# Altium PCB design6.PcbDoc
Units mil, origin at the board's own origin, x right, y up, seen from the top; angles counter-clockwise.
Board outline 866.14 x 3937.01 mil, 2 copper layers (Top Layer, Bottom Layer); 53 components, 36 nets, 172 pads, 186 vias.
Unrouted connection lines stored in the file: 50.
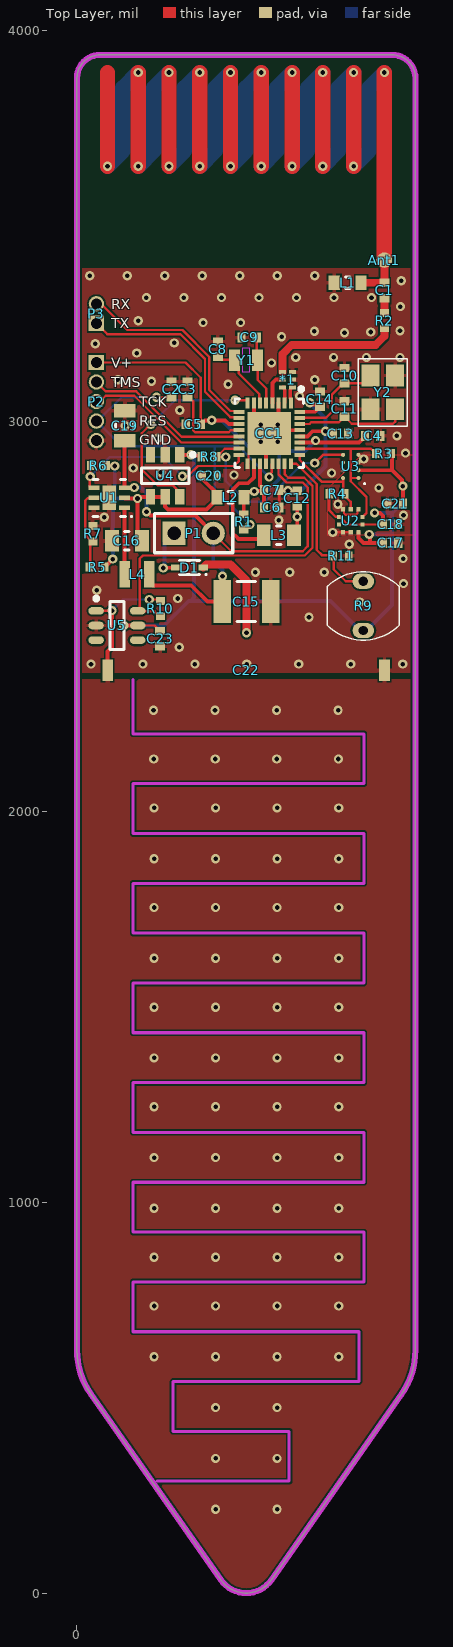
[diagram p0: Top Layer view]
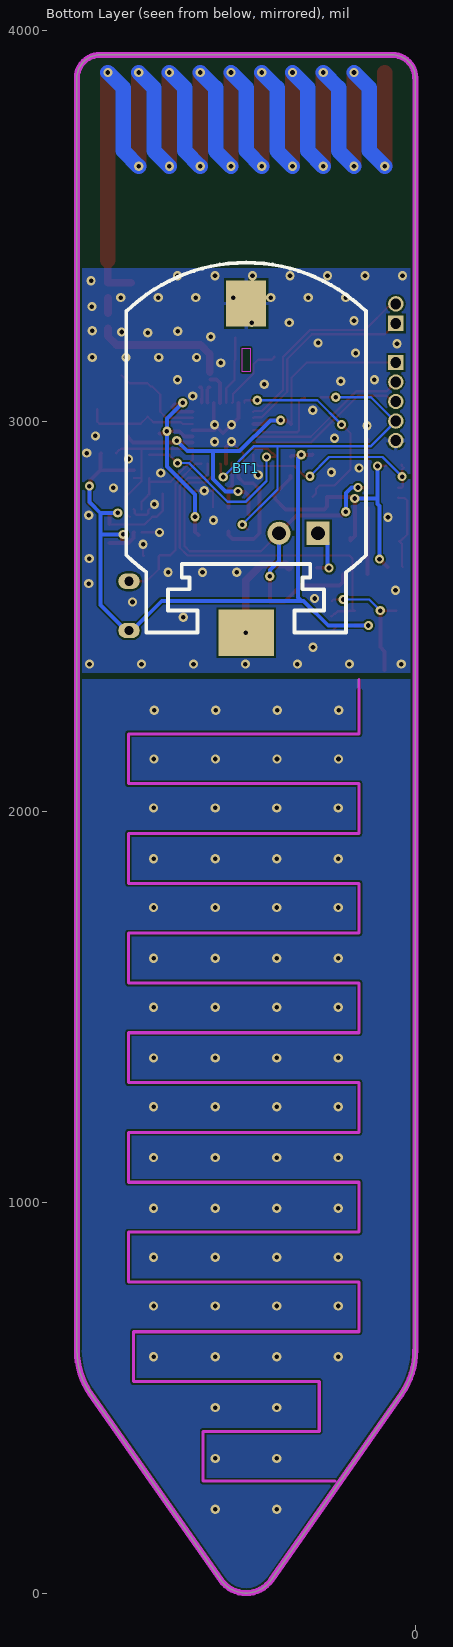
[diagram p1: Bottom Layer view, seen from below]
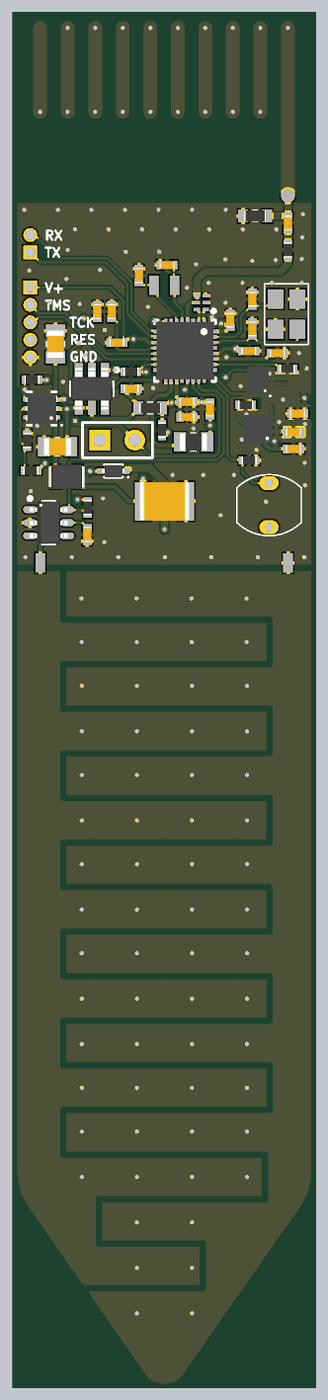
[diagram p2: 3D render of the assembled board from above, using the file's embedded part models]

## Layer stack, top to bottom
Top Solder: solder mask 0.4, Solder Resist, Dk 3.5
Top Layer: signal copper 1.4
Dielectric 1: dielectric 12.6, FR-4, Dk 4.8
Bottom Layer: signal copper 1.4
Bottom Solder: solder mask 0.4, Solder Resist, Dk 3.5

## Board outline
35.85,509.36 cw(c197.1,622.27) 0.25,622.27 0.25,3878.2 cw(c59.31,3878.2) 59.31,3937.26 807.34,3937.26 cw(c807.34,3878.2) 866.39,3878.2 866.39,622.27 cw(c669.54,622.27) 830.79,509.36 497.82,33.83 cw(c433.32,78.99) 368.82,33.83

## Design rules (kind name [scope] priority, off if disabled: settings)
Clearance [All] p1: gap=5 ignorepadtopadclearanceinfootprint=FALSE
DiffPairsRouting [All] p1: maxlimit=5 minlimit=5 mostfreqgap=5 toplayer_minwidth=8.58 toplayer_maxwidth=8.58 toplayer_prefwidth=8.58 bottomlayer_minwidth=8.58 bottomlayer_maxwidth=8.58 bottomlayer_prefwidth=8.58 maxuncoupledlength=500
Height Height_1 [InComponent('U2')] p1: minheight=0 maxheight=3937.01 prefheight=500
Height [All] p2: minheight=0 maxheight=1000 prefheight=500
HoleSize [All] p1: absolutevalues=TRUE maxlimit=100 minlimit=11.81 maxpercent=80.000 minpercent=20.000
MinimumSolderMaskSliver [All] p1: minsoldermaskwidth=5
PlaneClearance [All] p1: clearance=5
PlaneConnect [All] p1: planeconnectstyle=Direct reliefexpansion=20 reliefentries=4 reliefconductorwidth=10 reliefairgap=10
PolygonConnect [All] p1: thpad.connectstyle=Relief thpad.reliefconductorwidth=10 thpad.reliefentries=4 thpad.polygonreliefangle="90 Angle" thpad.airgapwidth=5 smdpad.connectstyle=Relief smdpad.reliefconductorwidth=10 smdpad.reliefentries=4 smdpad.polygonreliefangle="90 Angle" smdpad.airgapwidth=5 via.connectstyle=Direct via.reliefconductorwidth=10 via.reliefentries=4 via.polygonreliefangle="90 Angle" via.airgapwidth=10
RoutingVias [All] p1: holewidth=15.75 width=27.56 viastyle="Through Hole" minholewidth=11.81 minwidth=23.62 maxholewidth=19.68 maxwidth=31.5
SilkToSilkClearance [All] p1: silktosilkclearance=6
SolderMaskExpansion [All] p1: expansion=5
Width Width_50ohm [InNet('Net*1_1') OR InNet('NetAnt1_1')] p1: maxlimit=50 minlimit=20 preferedwidth=20 minimp=50.000000 maximp=50.000000 favimp=50.000000
Width [All] p2: maxlimit=10 minlimit=5 preferedwidth=6 minimp=50.000000 maximp=50.000000 favimp=50.000000
23 further rules are at their usual default settings.

## Classes and differential pairs
differential pair RF: +RF_P -RF_N

## Components (designator, comment, footprint, x,y, rotation, side; value= is the part's Value field where it differs from the comment)
*1 "0850BM14E0016" 0850BM14E0016 552,3086.32 r90 top
Ant1 "Antenna 868 Helix" ANTENNA_868_HELIX 787,3412 r180 top locked
BT1 "Battery Coin Cell" S8421-45R 433,2519.68 r180 bottom
C1 "Cap" "0402 (CAP)" 787,3334.31 r90 top value=8.2pF
C2 "Cap" "0402 (CAP)" 242,3081 r90 top value=100nF
C3 "Cap" "0402 (CAP)" 283,3081 r270 top value=1uF
C4 "Cap" "0402 (CAP)" 757,2962 r180 top value=100nF
C5 "Cap" "0402 (CAP)" 298,2992 r0 top value=100nF
C6 "Cap" "0402 (CAP)" 498.5,2779.19 r180 top value=22uF
C7 "Cap" "0402 (CAP)" 498.5,2823.19 r180 top value=100nF
C8 "Cap" "0402 (CAP)" 361,3184 r270 top value=12pF
C9 "Cap" "0402 (CAP)" 441,3214 r0 top value=12pF
C10 "DNM" "0402 (CAP)" 685,3116 r270 top value=12pF
C11 "DNM" "0402 (CAP)" 685,3031 r270 top value=12pF
C12 "Cap" "0402 (CAP)" 564,2802 r270 top value=22uF
C13 "Cap" "0402 (CAP)" 675,2968 r180 top value=100nF
C14 "Cap" "0402 (CAP)" 622,3056 r270 top value=100nF
C15 "GRM32EC70J107ME15L" "1210 (CAP)" 434,2538 r180 top value=100uF
C16 "Cap" "0805 (CAP)" 128,2694 r0 top value=22uF
C17 "Cap" "0402 (CAP)" 803,2688 r180 top value=100nF
C18 "Cap" "0402 (CAP)" 803,2736 r180 top value=100nF
C19 "Cap" "0805 (CAP)" 122,2988 r270 top value=10uF
C20 "Cap" "0402 (CAP)" 339,2860 r180 top value=1uF
C21 "Cap" "0402 (CAP)" 814.79,2789 r0 top value=100nF
C22 "Chumidity" SOIL_CAP 433.07,669.29 r0 top locked value=1pF
C23 "Cap" "0402 (CAP)" 213,2443 r90 top value=100nF
CC1 "CC1310F32RSMR" CC1310F32RSMR 492.38,2968.76 r270 top
D1 "RB751S40T5G" SOD-523 288,2625 r180 top
L1 "Inductor" "0603 (IND)" 693,3354 r180 top value=68nH
L2 "BLM18HE152SN1D" "0603 (IND)" 393,2805 r0 top value="1500 Ohm"
L3 "MLZ2012N6R8LT000" "0805 (IND)" 517,2708 r0 top value=6.8uH
L4 "Inductor" SRN2009T 154,2608 r180 top value=3.3uH
P1 "Header 2" HDR1X2 249,2713 r0 top
P2 "Header 5" 5pin-1.27 50,3050 r270 top
P3 "Header 2" 2pin-1.27 50,3275 r90 top
R1 "Res1" "0402 (RES)" 427,2742 r90 top value=100K
R2 "" "0402 (RES)" 787,3257 r90 top value=0
R3 "Res1" "0402 (RES)" 785,2917 r0 top value=4.7K
R4 "Res1" "0402 (RES)" 666,2814 r180 top value=4.7K
R5 "DNM" "0402 (RES)" 52,2626.49 r180 top value=0
R6 "Res1" "0402 (RES)" 55,2886 r180 top value=10K
R7 "DNM" "0402 (RES)" 41,2711.69 r90 top value=0
R8 "Res1" "0402 (RES)" 338.21,2909 r0 top value=4.7K
R9 "200K - 10K" Photoresistor 733,2527 r90 top
R10 "Rcharge" "0402 (RES)" 213.79,2520 r270 top value=1k
R11 "Res1" "0402 (RES)" 676,2655 r180 top value=4.7K
U1 "TPS61291" TPS61291 82.68,2803.37 r180 top
U2 "BMP388, Pressure sensor" BMP388 701,2745 r270 top
U3 "HDC1010, Humidity, Temp" HDC1010 701,2884 r180 top
U4 "TPS22860" SOT23-5 226,2860 r270 top
U5 "74LVC2G14, Inverting Schmitt Trigger" 74LVC2G14 102.46,2476.85 r0 top
Y1 "32.768 kHz" "FC-12M 32.7680KA-A3" 433,3156 r0 top
Y2 "TSX-3225 24.0000MF20G-AC3" "TSX-3225 24.0000MF20G-AC3" 782.91,3073.32 r270 top

## Footprints (in the part's own frame and the unit in brackets; to place one, negate y for a bottom-side part, rotate by r counter-clockwise, add the part's x,y. Pads: shape width x height; smd on the part's side, far side on the other; paste and mask are expansions set on the pad)
2pin-1.27 [mm]
  rect 1x1 hole 0.7: 1(-0.635,0)
  round 1 hole 0.7: 2(0.635,0)
5pin-1.27 [mm]
  rect 1x1 hole 0.7: 1(-2.54,0)
  round 1 hole 0.7: 2(-1.27,0) 3(0,0) 4(1.27,0) 5(2.54,0)
74LVC2G14 [mm] "TSOP, 6-Leads, Body 2,90x1,50mm, Pitch 0,95mm, IPC Medium Density"
  oval 1x0.5 smd: 1(-1.35,0.95) 2(-1.35,0) 3(-1.35,-0.95) 4(1.35,-0.95) 5(1.35,0) 6(1.35,0.95)
  silkscreen extent -1.47,-1.55 0.45,1.87, body extent -1.38,-1.55 1.38,1.55, height 1.1
"0402 (CAP)" [mm] "Chip Capacitor, 2-Leads, Body 1,60x0,80mm, IPC Medium Density"
  rect 0.54x0.64 smd: 1(-0.5,0) 2(0.5,0)
  body extent -0.55,-0.3 0.55,0.3, height 0.4
"0402 (RES)" [mm] "Chip Resistor, 2-Leads, Body 1,00x0,50mm, IPC Medium Density"
  rect 0.5x0.6 smd: 1(-0.5,0) 2(0.5,0)
  body extent -0.55,-0.3 0.55,0.3, height 0.4
"0603 (IND)" [mm]
  rect 0.72x0.94 smd: 1(-0.87,0) 2(0.87,0)
  silkscreen extent -0.15,-0.37 0.15,0.37, body extent -0.8,-0.4 0.8,0.4, height 0.6
"0805 (CAP)" [mm] "Chip Capacitor, 2-Leads, Body 2,00x1,25mm, IPC Medium Density"
  rect 0.9x1.4 smd: 1(-0.975,0) 2(0.975,0)
  silkscreen extent -0.15,-0.6 0.15,0.6, body extent -1,-0.63 1,0.63, height 0.6
"0805 (IND)" [mm] "Chip Inductor, 2-Leads, Body 2,00x1,25mm, IPC Medium Density"
  rect 0.9x1.39 smd: 1(-0.98,0) 2(0.98,0)
  silkscreen extent -0.15,-0.6 0.15,0.6, body extent -1,-0.63 1,0.63, height 0.6
0850BM14E0016 [mm]
  rect 0.25x0.45 smd: 1(1,0.65) 2(0.5,0.65) 3(0,0.65) 4(0,0) 5(0.5,0) 6(1,0)
"1210 (CAP)" [mm] "Chip Capacitor, 2-Leads, Body 3,20x2,50mm, IPC Medium Density"
  rect 1.15x2.8 smd: 1(-1.575,0) 2(1.575,0)
  silkscreen extent -0.6,-1.3 0.6,1.3, body extent -1.8,-1.4 1.8,1.4, height 2.8
ANTENNA_868_HELIX [mm]
  round 1 smd: 1(0,0)
  Top Layer lines w1: 18,-6.1 18,-12.2 ; 16,-6.1 16,-12.2 ; 14,-6.1 14,-12.2 ; 12,-6.1 12,-12.2 ; 10,-6.1 10,-12.2 ; 8,-6.1 8,-12.2 ; 6,-6.1 6,-12.2 ; 4,-6.1 4,-12.2 ; 2,-6.1 2,-12.2 ; 0,0 0,-12.2
  Bottom Layer lines w1: 18,-6.1 17,-7.1 17,-11.2 16,-12.2 ; 16,-6.1 15,-7.1 15,-11.2 14,-12.2 ; 14,-6.1 13,-7.1 13,-11.2 12,-12.2 ; 12,-6.1 11,-7.1 11,-11.2 10,-12.2 ; 10,-6.1 9,-7.1 9,-11.2 8,-12.2 ; 8,-6.1 7,-7.1 7,-11.2 6,-12.2 ; 6,-6.1 5,-7.1 5,-11.2 4,-12.2 ; 4,-6.1 3,-7.1 3,-11.2 2,-12.2 ; 2,-6.1 1,-7.1 1,-11.2 0,-12.2
BMP388 [mm] "LGA, 10-Leads, Body 2,00x2,00mmx0,80mm, Pitch 0,50mm"
  rect 0.275x0.275 smd: 1(0.25,0.762) 2(-0.25,0.762) 3(-0.75,0.5) 4(-0.75,0) 5(-0.75,-0.5) 6(-0.25,-0.763) 7(0.25,-0.763) 8(0.75,-0.5) 9(0.75,0) 10(0.75,0.5)
  body extent -1.02,-1.03 1.65,1.02, height 30
CC1310F32RSMR [mm] "QFN, 32-Leads, Body 4,00x4,00mm, Pitch 0,40mm, Thermal Pad 2,80x2,80mm, IPC Medium Density"
  rect 0.7x0.26 smd: 1(-1.975,1.4) 2(-1.975,1) 3(-1.975,0.6) 4(-1.975,0.2) 5(-1.975,-0.2) 6(-1.975,-0.6) 7(-1.975,-1) 8(-1.975,-1.4) 17(1.975,-1.4) 18(1.975,-1) 19(1.975,-0.6) 20(1.975,-0.2) 21(1.975,0.2) 22(1.975,0.6) 23(1.975,1) 24(1.975,1.4)
  rect 0.26x0.7 smd: 9(-1.4,-1.975) 10(-1,-1.975) 11(-0.6,-1.975) 12(-0.2,-1.975) 13(0.2,-1.975) 14(0.6,-1.975) 15(1,-1.975) 16(1.4,-1.975) 25(1.4,1.975) 26(1,1.975) 27(0.6,1.975) 28(0.2,1.975) 29(-0.2,1.975) 30(-0.6,1.975) 31(-1,1.975) 32(-1.4,1.975)
  rect 2.8x2.8 smd: 33(0,0)
  silkscreen extent -3,-2.22 2.22,2.22, body extent -2.08,-2.08 2.08,2.08, height 1
"FC-12M 32.7680KA-A3" [mm]
  rect 0.7x1.4 smd: 1(-0.75,0) 2(0.75,0)
  Keep-Out Layer region: -0.254,-0.762 0.254,-0.762 0.254,0.762 -0.254,0.762
HDC1010 [mm] "BGA, 8-Leads, Body 1,59x2,04mmx0,68mm, Pitch 0,50mm"
  round 0.26 smd: A1(-0.5,0.75) A2(0.5,0.75) B1(-0.5,0.25) B2(0.5,0.25) C1(-0.5,-0.25) C2(0.5,-0.25) D1(-0.5,-0.75) D2(0.5,-0.75)
  silkscreen extent -0.95,1.08 -0.85,1.17, body extent -0.79,-1.02 0.79,1.02, height 0.67
HDR1X2 [mm] "Connector; Header; 2 Position"
  rect 1.5x1.5 hole 0.9: 1(0,0)
  round 1.5 hole 0.9: 2(2.54,0)
  silkscreen extent -1.27,-1.27 3.81,1.27
Photoresistor [mm]
  oval 1x1.4 hole 0.6: 1(-1.6,0) 2(1.6,0)
  silkscreen extent -2.22,-2.35 2.22,2.35
S8421-45R [mm]
  rect 3.6x3 smd: 1(0,-1.556)
  rect 2.6x3 smd: 2(0,19.844)
  silkscreen extent -7.8,-1.56 7.8,22.5
SOD-523 [mm] "Molded Diode, 2-Leads, Body 1,20x0,80mm, IPC Medium Density"
  rect 0.6x0.4 smd: 1(-0.9,0) 2(0.9,0)
  silkscreen extent -1.12,-0.45 0.65,0.5, body extent -0.87,-0.45 0.87,0.45, height 0.7
SOIL_CAP [mm]
  rect 0.7x1.4 smd: 1(-9,43) 2(9,43)
  Keep-Out Layer lines w0.2: -7.339,42.393 -7.339,38.867 7.661,38.867 7.661,35.628 -7.339,35.628 -7.339,32.389 7.661,32.389 7.661,29.15 -7.339,29.15 -7.339,25.911 7.661,25.911 7.661,22.672 -7.339,22.672 -7.339,19.434 7.661,19.434 7.661,16.195 -7.339,16.195 -7.339,12.956 7.661,12.956 7.661,9.717 -7.339,9.717 -7.339,6.478 7.661,6.478 7.661,3.239 -7.339,3.239 -7.339,0 7.339,0 7.339,-3.239 -4.749,-3.239 -4.749,-6.478 2.803,-6.478 2.803,-9.717 -5.777,-9.717
SOT23-5 [mm] "SOT23, 5-Leads, Body 2,90x2,80mm, Pitch 0,95mm, IPC Medium Density"
  rect 1x0.6 smd: 1(-1.375,0.95) 2(-1.375,0) 3(-1.375,-0.95) 4(1.375,-0.95) 5(1.375,0) 6(1.375,0.95)
  silkscreen extent -1.5,-1.55 0.5,1.93, body extent -1.5,-1.53 1.5,1.53, height 1.45
SRN2009T [mm] "Molded Inductor, 2-Leads, Body 2,00x1,60mm, IPC Medium Density"
  rect 0.7x1.7 smd: 1(-0.8,0) 2(0.8,0)
  body extent -1.32,-0.9 1.32,0.9, height 0.95
TPS61291 [mm] "SON, 6-Leads, Body 2,00x2,00mm, Pitch 0,65mm, Thermal Pad 1,60x0,89mm, IPC Medium Density"
  rect 0.7x0.3 smd: 1(-0.995,0.65) 2(-0.995,0) 3(-0.995,-0.65) 4(0.995,-0.65) 5(0.995,0) 6(0.995,0.65)
  rect 0.89x1.6 smd: 7(0,0)
  silkscreen extent -1.5,-1.2 1.05,1.25, body extent -1.13,-1.05 1.13,1.05, height 0.8
"TSX-3225 24.0000MF20G-AC3" [mm]
  rect 1.4x1.15 smd: 1(-1.1,-0.8) 2(1.1,-0.8) 3(1.1,0.8) 4(-1.1,0.8)
  silkscreen extent -2.2,-1.6 2.2,1.6

## Part data
C1 C2 C3 C4 C5 C6 C7 C8 C9 C12 C13 C14 C16 C17 C18 C19 C20 C21 C23: "Capacitor", LatestRevisionDate=17-Jul-2002, LatestRevisionNote="Re-released for DXP Platform.", PackageDescription="Radial Cap, Thru-Hole; 2 Leads; 0.3 in Pin Spacing", PackageReference=RAD-0.3, Published=8-Jun-2000, Publisher="Altium Limited"
C10 C11 C15 C22: library part Cap, "Capacitor", LatestRevisionDate=17-Jul-2002, LatestRevisionNote="Re-released for DXP Platform.", PackageDescription="Radial Cap, Thru-Hole; 2 Leads; 0.3 in Pin Spacing", PackageReference=RAD-0.3, Published=8-Jun-2000, Publisher="Altium Limited"
D1: library part "D Schottky", "Schottky Diode", Code_JEDEC=DO-214-AA, LatestRevisionDate=17-Jul-2002, LatestRevisionNote="Re-released for DXP Platform.", PackageDescription="DO-214-AA/SMB; 2 C-Bend Leads; Body 5.3 x 3.6 mm, inc. leads (LxW)", PackageReference=SMB, Published=8-Jun-2000, Publisher="Altium Limited"
L2: library part "Inductor Iron", "Magnetic-Core Inductor", LatestRevisionDate=17-Jul-2002, LatestRevisionNote="Re-released for DXP Platform.", PackageDescription="Axial Device, Thru-Hole; 2 Leads; 0.9 in Pin Spacing", PackageReference=AXIAL-0.9, Published=24-Mar-1999, Publisher="Altium Limited"
L3: library part Inductor, "Inductor", Code_IEC=1005, Code_JEITA=0402, LatestRevisionDate=29-May-2009, LatestRevisionNote="IPC-7351 Footprint Added.", PackageDescription="Chip Inductor", PackageReference=0402-A, Published=8-Jun-2000, Publisher="Altium Limited"
P1 P3: "Header, 2-Pin", LatestRevisionDate=17-Jul-2002, LatestRevisionNote="Re-released for DXP Platform.", Publisher="Altium Limited"
P2: "Header, 5-Pin", LatestRevisionDate=17-Jul-2002, LatestRevisionNote="Re-released for DXP Platform.", Publisher="Altium Limited"
R1 R3 R4 R6 R8 R11: "Resistor", LatestRevisionDate=17-Jul-2002, LatestRevisionNote="Re-released for DXP Platform.", PackageDescription="Axial Device, Thru-Hole; 2 Leads; 0.3 in Pin Spacing", PackageReference=AXIAL-0.3, Published=8-Jun-2000, Publisher="Altium Limited"
R2 R5 R7 R10: library part Res1, "Resistor", LatestRevisionDate=17-Jul-2002, LatestRevisionNote="Re-released for DXP Platform.", PackageDescription="Axial Device, Thru-Hole; 2 Leads; 0.3 in Pin Spacing", PackageReference=AXIAL-0.3, Published=8-Jun-2000, Publisher="Altium Limited"
R9: library part "Photo Resistor"
U2: library part BMP388
U3: library part HDC1010
U5: library part 74LVC2G14
Y1: library part XTAL, "Crystal Oscillator", LatestRevisionDate=17-Jul-2002, LatestRevisionNote="Re-released for DXP Platform.", PackageDescription="Crystal, Thru-Hole; 2 Leads; Body 3.1 x 8.2 mm (Dia.xH)", PackageReference=R38, Published=8-Jun-2000, Publisher="Altium Limited"
Y2: library part Crystal
L1 L4: Code_IEC=1005, Code_JEITA=0402, LatestRevisionDate=29-May-2009, LatestRevisionNote="IPC-7351 Footprint Added.", PackageDescription="Chip Inductor", PackageReference=0402-A, Published=8-Jun-2000, Publisher="Altium Limited"

## Via types
v1: diameter 23.62, hole 11.81, Top Layer to Bottom Layer, tented both sides, 186 vias

## Nets (pads, with @x,y where several pads share a name; then routed paths per layer and width w, separated by ;. In a path a pad name is that pad's centre, name@x,y a point inside that pad or via, vN(x,y) a via of type N, cw(c..) or ccw(c..) an arc to the next point about the centre after c; other vN are vias at no path point)
BMP_INT: U2.7
DCDC_SW: CC1.18 L3.1 | length 313.4
  Top Layer w10: CC1.18 453,2856 438,2841 414.97,2841 399,2825.03 399,2713 408,2704 408,2703.86 413.86,2698 468.42,2698 L3.1 L3.1@478.42,2717.65
DRDYn: CC1.15 R8.2 U3.D2 | length 523.4
  Top Layer w6: v1(381,2908) 358.9,2908 R8.2 357.9,2910.97 364.74,2917.81 366.71,2917.81 378.28,2929.39 CC1.15 ; v1(609,2892.53) 630,2913.53 U3.D2
  Bottom Layer w6: v1(381,2908) 381,2846.98 434.88,2793.1 480.1,2793.1 579.53,2892.53 v1(609,2892.53)
EN_BYP: CC1.16 R6.2 U1.4 | length 525.8
  Top Layer w6: R6.2@35.31,2887.97 R6.2 30,2880.69 34,2876.69 v1(34,2858) 32.73,2856.73 32.73,2831.86 35.64,2828.96 U1.4 ; v1(270,2859) 283.77,2859 309.77,2885 401.45,2885 414.62,2898.17 CC1.16
  Bottom Layer w6: v1(34,2858) 84,2908 221,2908 v1(270,2859)
GND: *1.5 *1.6 BT1.2 C2.2 C3.1 C4.1 C5.1 C6.1 C7.1 C8.1 C9.1 C10.1 C11.1 C12.1 C13.1 C14.1 C15.1 C16.1 C17.1 C18.1 C19.1 C20.1 C21.1 C22.2 C23.1 CC1.3 CC1.7 CC1.17 CC1.20 CC1.29 CC1.33 L1.2 P2.5 R7.2 R11.1 U1.6 U1.7 U2.3 U2.5 U2.8 U2.9 U3.B2 U3.C1 U3.D1 U4.2 U5.2 Y2.2 Y2.4 | length 615.8
  Top Layer w5: CC1.17 439.76,2893.5 439.76,2916.14 v1(470.72,2947.1)
  Top Layer w6: C6.1 C7.1 519.68,2821.68 v1(540.3,2821.68) C12.1 ; v1(655,2715) 655.24,2715.24 681.08,2715.24 U2.8 U2.9 ; v1(668,2787) 668.84,2787 U2.5 683.73,2772.11 683.73,2764.24 687.96,2760 714,2760 718.27,2764.27 718.27,2772.11 U2.3 ; R11.1 697,2656.32 v1(697,2685)
  Top Layer w10: CC1.7 453.01,3008.13 v1(470.72,2990.41) CC1.33 v1(514.03,2990.41) 516,2992.38 CC1.3 ; v1(470.72,2947.1) 484.5,2933.32 CC1.20 ; CC1.33@514.03,2976.63 CC1.29
  other v1: 355.04,215 512.52,215 355.04,475 512.52,475 197.56,735 355.04,735 512.52,735 670,735 197.56,985 355.04,985 512.52,985 670,985 197.56,1245 355.04,1245 512.52,1245 670,1245 197.56,1500 355.04,1500 512.52,1500 670,1500 197.56,1755 355.04,1755 512.52,1755 670,1755 197.56,2010 355.04,2010 512.52,2010 670,2010 196.14,2260 353.62,2260 511.1,2260 668.58,2260 36,2378 169,2378 302,2378 435,2378 568,2378 701,2378 834,2378 262,2421 594,2498 724,2537 258,2546 51,2567 836,2584 457,2613 545,2613 633,2613 835,2648 517,2746.4 70,2754 836,2759 773,2829 402,2862 652,2867 215,2869 144,2880 734,2903 841,2918 514.03,2947.1 207,2956 819,2962 123.78,2988 263,3028 570,3064 387,3094 191,3102 105,3106 609,3106 498,3149 560,3163 657,3163 741,3163 827,3163 153,3174 47,3198 249,3200 524,3216 685,3226 752,3228 608,3230 827,3231 323,3252 419,3252 157,3257 828,3293 178,3316 274,3316 370,3316 466,3316 562,3316 658,3316 754,3316 830,3359 33,3372 129,3372 225,3372 321,3372 417,3372 513,3372 609,3372
JTAG_TCK: CC1.14 P2.3 | length 420.5
  Top Layer w6: P2.3 59.03,3050 74.03,3065 147,3065 266.87,2945.13 CC1.14
JTAG_TMS: CC1.13 P2.2 | length 423
  Top Layer w6: P2.2 74,3076 152,3076 268,2960 413.74,2960 CC1.13
Net*1_1: *1.1 R2.1 | length 345.3
  Top Layer w20: *1.1@526.41,3125.92 526.41,3171.41 550,3195 765,3195 787,3217 R2.1
Net*1_2: *1.2 CC1.4 | length 78.7
  Top Layer w10: CC1.4 500.25,3097.25 509,3106 *1.2@524.64,3106
NetAnt1_1: Ant1.1 C1.2 L1.1 | length 111.4
  Top Layer w20: L1.1 C1.2 787.2,3354.2 787.2,3405.31 Ant1.1@787.4,3405.51
  other v1: 78.34,3652.16 157.08,3652.16 235.82,3652.16 314.56,3652.16 393.3,3652.16 472.04,3652.16 550.78,3652.16 629.52,3652.16 708.26,3652.16 157.08,3892.32 235.82,3892.32 314.56,3892.32 393.3,3892.32 472.04,3892.32 550.78,3892.32 629.52,3892.32 708.26,3892.32 787,3892.32
NetBT1_1: BT1.1 D1.1 | length 265
  Top Layer w20: D1.1 323.43,2625.32 331.12,2633 393,2633 434,2592 v1(434,2458)
NetC1_1: C1.1 R2.2 | length 37.9
  Top Layer w20: R2.2 C1.1
NetC3_2: C3.2 CC1.12 | length 218.5
  Top Layer w6: C3.2@283,3059.31 284.97,3059.31 283,3057.35 291.62,3057.35 298,3050.97 298,2975.77 302.77,2971 388,2971 393.63,2976.63 CC1.12
NetC8_2: C8.2 CC1.6 Y1.1 | length 182.4
  Top Layer w6: C8.2 368.63,3156.68 402.79,3156.68 Y1.1 414.25,3145.22 414.25,3121.75 466.71,3069.29 466.71,3048.56 CC1.6
NetC9_2: C9.2 CC1.5 Y1.2 | length 177.4
  Top Layer w6: C9.2 460.69,3157.84 Y1.2 463,3155.53 463,3105 484.5,3083.5 CC1.5
NetC10_2: C10.2 CC1.31 Y2.1 | length 252
  Top Layer w6: CC1.31 637.13,3008.13 653,3024 653,3068 673.68,3088.68 677.37,3088.68 C10.2 685.67,3096.99 731.78,3096.99 Y2.1
NetC11_2: C11.2 CC1.30 Y2.3 | length 293.5
  Top Layer w6: CC1.30 595.38,2992.38 600,2997 670.69,2997 C11.2 703.31,2993 809,2993 814.41,2998.41 Y2.3
NetC22_1: C22.1 R10.1 U5.1 | length 334.4
  Top Layer w6: U5.1 49.69,2514.62 v1@89.62,2514.62 ; v1(185.14,2543.25) 210.23,2543.25 R10.1
  Top Layer w10: C22.1 78.74,2410.74 89.62,2421.62 v1@89.62,2514.62
  Bottom Layer w6: v1(90,2515) 118.25,2543.25 v1(185.14,2543.25)
  other v1: 355.04,345 512.52,345 197.56,605 355.04,605 512.52,605 670,605 197.56,860 355.04,860 512.52,860 670,860 197.56,1115 355.04,1115 512.52,1115 670,1115 197.56,1370 355.04,1370 512.52,1370 670,1370 197.56,1625 355.04,1625 512.52,1625 670,1625 197.56,1880 355.04,1880 512.52,1880 670,1880 196.85,2135 354.33,2135 511.81,2135 669.29,2135
NetCC1_24: CC1.24 R9.2 R11.2 | length 428.7
  Top Layer w6: CC1.24 562,2891 614,2839 614,2670 627,2657 654.31,2657 R11.2 657,2654.31 657,2621 688.01,2589.99 R9.2
NetD1_2: D1.2 P1.1 | length 132.6
  Top Layer w6: D1.2@252.07,2624.5 D1.2
  Top Layer w10: v1(221,2624) 221.5,2624.5 D1.2@252.07,2624.5
  Bottom Layer w10: v1(221,2624) 221,2627.69 224.47,2631.16 224.47,2688.47 P1.1
NetL4_2: L4.2 U1.1 | length 170
  Top Layer w10: U1.1 122.18,2777.45 122.18,2608.32 L4.2
NetR5_2: R5.2 R7.1 U1.5 | length 208.1
  Top Layer w6: R5.2 34.16,2628.33 34.16,2685.16 R7.1 39.03,2692.01 21,2710.04 21,2796 28,2803 43.14,2803 U1.5
PWR_ON: CC1.8 U4.6 | length 538.2
  Top Layer w6: v1(189,2991) 188,2991 166,2969 166,2876 207,2835 246.09,2835 254.59,2826.5 254.59,2814.68 U4.6 ; v1(404.78,3053.37) 435.14,3053.37 437.26,3051.25 CC1.8
  Bottom Layer w6: v1(189,2991) 251.37,3053.37 v1(404.78,3053.37)
RESET_N: C2.1 CC1.21 P2.4 R1.1 | length 1015.6
  Top Layer w6: v1(204,3061) 241.69,3061 C2.1 ; R1.1 428.97,2722.32 441.65,2735 v1(443,2735) ; v1(492,2857) 492,2861.77 498.45,2868.22 498.45,2889.2 CC1.21
  Bottom Layer w6: v1(204,3061) 114,3061 53,3000 P2.4 114,2936 352.96,2936 ; v1(443,2735) 352.96,2825.04 352.96,2936 ; v1(492,2857) 413,2936 352.96,2936
RF_N: *1.3 CC1.2 | length 44.9
  Top Layer w8.58: *1.3 530.35,3086.32 530.98,3085.68 530.98,3082.09 532.41,3080.66 532.41,3047.18 CC1.2
RF_P: *1.4 CC1.1 | length 45.2
  Top Layer w8.58: CC1.1 546.67,3047.34 546.67,3057.66 546.16,3058.17 546.16,3065.24 545.99,3065.4 545.99,3080.66 547.43,3082.09 547.43,3085.68 548.06,3086.32 *1.4
SCL: CC1.26 R3.1 U2.2 U3.A1 | length 416.7
  Top Layer w6: CC1.26 700.85,2929.39 ; U3.A1 701.32,2854.47 701,2854.15 ; U2.2 741.18,2765 741.18,2805.98 701,2846.16 701,2854.15 ; R3.1 765.32,2918.97 758.47,2925.81 756.5,2925.81 752.93,2929.39 700.85,2929.39 ; 700.85,2929.39 701,2929.23 701,2854.15
SDA: CC1.25 R4.1 U2.4 U3.A2 | length 232.1
  Top Layer w6: CC1.25 570.13,2900.87 625.99,2845.01 681.31,2845.01 ; U3.A2@680.5,2853.66 U3.A2 681.31,2845.01 ; R4.1@681.31,2812.4 681.31,2845.01 ; R4.1@685.68,2810 685.68,2808.57 701,2793.26 U2.4
SOIL_HUMIDITY: CC1.23 R10.2 U5.6 | length 924
  Top Layer w6: R10.2@215.76,2500.31 R10.2 206.94,2507.16 204.84,2507.16 199,2513 170.41,2513 169.16,2514.25 U5.6 161,2519.63 161,2648 169,2656 583,2656 603,2676 603,2834 582,2855 541,2855 531.75,2864.25 CC1.23
UART_RX: CC1.9 P3.2 | length 528.5
  Top Layer w6: P3.2 51,3299 63,3299 129,3233 270,3233 339,3164 339,3079.56 392.56,3025.99 412.5,3025.99 CC1.9
UART_TX: CC1.10 P3.1 | length 514
  Top Layer w6: P3.1 78,3222 265,3222 328,3159 328,3075 392.76,3010.24 412.5,3010.24 CC1.10
V_switch: C17.2 C18.2 C21.2 C23.2 R3.2 R4.2 R8.1 R9.1 U2.1 U2.6 U2.10 U3.B1 U4.1 U5.5 | length 2298.5
  Top Layer w6: U5.5 198.84,2476.85 C23.2 ; R4.2 646.31,2771.11 662.58,2754.84 U2.6 673.68,2754.84 693.36,2735.16 U2.1 782.47,2735.16 C18.2
  Top Layer w10: v1(120.18,2476.85) U5.5 ; U4.1 263.94,2913.59 v1(291.97,2913.59) 294.27,2911.3 316.23,2911.3 R8.1 ; U2.10 721.1,2715.06 721.1,2700.9 734,2688 750.61,2688 ; U3.B1 806.13,2874.16 806.34,2874.37 ; v1(748,2710) 750.61,2707.39 750.61,2688 ; v1(762,2765) 776,2765 783.31,2757.69 C18.2 ; C17.2 750.61,2688 ; R3.2 806.34,2915.34 806.34,2874.37 ; C21.2 834.43,2789.05 834.43,2833.48 834.47,2833.53 v1(834.38,2833.62) 831.77,2836.23 831.77,2848.94 806.34,2874.37
  Bottom Layer w10: v1(120.18,2476.85) 223.15,2476.85 286.31,2540 291.51,2540 ; v1(291.97,2913.59) 300,2905.57 300,2548.49 291.51,2540 ; v1(748,2710) 804.94,2710 806,2711.06 ; v1(762,2765) 805.12,2765 806,2764.12 ; v1(834.38,2833.62) 834.38,2792.5 806,2764.12 ; 291.51,2540 649.13,2540 725.13,2464.01 R9.1 740.87,2464.01 806,2529.13 806,2711.06 ; 806,2711.06 806,2764.12
Vbat: C15.2 C19.2 CC1.22 L4.1 P1.2 U1.3 | length 1379.1
  Top Layer w6: P1.2 395,2667 578,2667 591,2680 591,2830 578,2843 536.46,2843 516,2863.46 CC1.22
  Top Layer w10: C19.2@127.09,2958.61 121.86,2953.38 U1.3 122.38,2829.48 146.48,2829.48 v1(147,2830) ; v1(178.13,2768) 188.13,2758 304,2758 P1.2 ; L4.1 185.5,2588.32 194.28,2579.54 292.82,2579.54 334.35,2538 C15.2 373,2539.01 372.57,2539.44 v1(372.57,2602.96)
  Bottom Layer w10: v1@149.07,2830 164,2830 178.13,2815.87 v1(178.13,2768) ; P1.2 349,2642 372.57,2618.43 v1(372.57,2602.96)
VCC: C16.2 C20.2 L2.1 R5.1 R6.1 U1.2 U4.4 U4.5 | length 828.2
  Top Layer w6: R6.1 97,2886 v1(97,2885)
  Top Layer w10: R5.1 v1(91.91,2646.71) ; U1.2 123.22,2802 v1(155,2802) ; C16.2@166.39,2700.91 C16.2 155,2705.39 v1(155,2802) ; C20.2 319.31,2853.69 363.37,2809.63 L2.1 358.75,2800.67 332.08,2774 233,2774 226,2781 U4.5 U4.4 161.79,2805.87 159.29,2803.37 155,2803.37 v1(155,2802)
  Bottom Layer w10: v1(91.91,2646.71) 91.91,2782.91 97,2788 97,2802.14 ; v1(97,2885) 97,2802.14 ; v1(155,2802) 97.14,2802 97,2802.14
VDDR: C12.2 C13.2 C14.2 CC1.28 CC1.32 L3.2 | length 589.4
  Top Layer w10: L3.2 564,2716.42 v1(564,2754.96) C12.2 ; CC1.28 570.25,2961 590.47,2961 603.36,2973.89 v1(636,2973.89) 636,2968.5 636.25,2968.25 655.06,2968.25 C13.2 ; CC1.32 609.56,3023.87 C14.2 616.37,3041.94 v1@604.15,3041.94
  Bottom Layer w10: v1(564,2754.96) 564,2812 636,2884 v1(636,2973.89) 636,3006.41 v1(595.72,3046.68)
VDDS: C4.2 C5.2 C6.2 C7.2 CC1.11 CC1.19 CC1.27 L2.2 P2.1 R1.2 | length 1356.2
  Top Layer w6: P2.1 278,3150 317,3111 317,2992.69 C5.2
  Top Layer w10: C5.2 317.94,2992.26 318.2,2992 328.2,3002 v1(345,3002) 379,3002 388.62,2992.38 CC1.11 ; R1.2 427.13,2761.81 427.13,2804.87 L2.2 427.25,2809.33 436.43,2818.5 452.5,2818.5 v1(454,2820) 455.59,2821.59 477.22,2821.59 C7.2 ; CC1.19 468.76,2835.21 478.81,2825.16 C7.2 ; C6.2 C7.2 ; CC1.27 570.25,2945.02 611,2945.02 722.3,2945.02 737.31,2960.03 C4.2
  Bottom Layer w10: v1(345,3002) 371,3002 450,2923 584,2923 v1(611,2950) ; v1(454,2820) 485.85,2820 518,2852.15 518,2917
pads on no net: U3.C2 U4.3 U5.3 U5.4

## Polygon pours and split planes (outlines as drawn)
GND on Top Layer "Top Layer-GND 1" (solid, pour order 76): 866.39,3391.58 0,3391.58 0,2356.25 866.39,2356.25
no net on Top Layer "Top Layer-No Net 1" (solid, pour order 74): 556.35,3027.82
V_switch on Top Layer "Top Layer-No Net" (solid, shelved, pour order 62): 866.39,2912.32 727.99,2912.32 640.57,2824.91 640.57,2709.06 866.39,2709.06
GND on Top Layer "Top Layer-GND" (solid, pour order 44): 734.69,2071.98 734.69,2199.49 144,2199.49 144,2339 866.39,2339 866.39,622.27 846.6,536.25 484.05,18.77 433.07,0.25 368.82,33.83 191.73,286.74 543.43,286.74 543.43,414.26 246.1,414.26 246.1,541.77 722.01,541.77 722.01,669.29 144.13,669.29 144.13,796.81 734.69,796.81 734.69,924.33 144.13,924.33 144.13,1051.84 734.69,1051.84 734.69,1179.36 144.13,1179.36 144.13,1306.88 734.69,1306.88 734.69,1434.39 144.13,1434.39 144.13,1561.91 734.69,1561.91 734.69,1689.43 144.13,1689.43 144.13,1816.94 734.69,1816.94 734.69,1944.46 144.13,1944.46 144.13,2071.98
NetC22_1 on Top Layer "Top Layer-NetC28_1" (solid, pour order 14): 144.13,2199.49 734.69,2199.49 734.69,2070.41 144.13,2070.41 144.13,1944.46 734.69,1944.46 734.69,1816.94 144.13,1816.94 144.13,1689.43 734.69,1689.43 734.69,1561.91 144.13,1561.91 144.13,1434.39 734.69,1434.39 734.69,1306.88 144.13,1306.88 144.13,1179.36 734.69,1179.36 734.69,1051.84 144.13,1051.84 144.13,924.33 734.69,924.33 734.69,796.81 144.13,796.81 144.13,669.29 722.01,669.29 722.01,541.77 246.1,541.77 246.1,414.26 543.43,414.26 543.43,286.74 205.62,286.74 0,574 0,2339 144.13,2339
GND on Bottom Layer "Bottom Layer-GND" (solid, pour order 80): 866.39,3391.58 0,3391.58 0,2356.25 866.39,2356.25
no net on Bottom Layer "Bottom Layer-No Net" (solid, pour order 66): 350,3047
NetC22_1 on Bottom Layer "Top Layer-NetC28_1" (solid, pour order 48): 144.13,2199.49 734.69,2199.49 734.69,2070.41 144.13,2070.41 144.13,1944.46 734.69,1944.46 734.69,1816.94 144.13,1816.94 144.13,1689.43 734.69,1689.43 734.69,1561.91 144.13,1561.91 144.13,1434.39 734.69,1434.39 734.69,1306.88 144.13,1306.88 144.13,1179.36 734.69,1179.36 734.69,1051.84 144.13,1051.84 144.13,924.33 734.69,924.33 734.69,796.81 144.13,796.81 144.13,669.29 722.01,669.29 722.01,541.77 246.1,541.77 246.1,414.26 543.43,414.26 543.43,286.74 205.62,286.74 0,574 0,2339 144.13,2339
GND on Bottom Layer "Top Layer-GND" (solid, pour order 46): 734.69,2071.98 734.69,2199.49 144,2199.49 144,2339 866.39,2339 866.39,622.27 846.6,536.25 484.05,18.77 433.07,0.25 368.82,33.83 191.73,286.74 543.43,286.74 543.43,414.26 246.1,414.26 246.1,541.77 722.01,541.77 722.01,669.29 144.13,669.29 144.13,796.81 734.69,796.81 734.69,924.33 144.13,924.33 144.13,1051.84 734.69,1051.84 734.69,1179.36 144.13,1179.36 144.13,1306.88 734.69,1306.88 734.69,1434.39 144.13,1434.39 144.13,1561.91 734.69,1561.91 734.69,1689.43 144.13,1689.43 144.13,1816.94 734.69,1816.94 734.69,1944.46 144.13,1944.46 144.13,2071.98

## Keep-outs
Keep-Out Layer:
  lines w15.75: 0,624 0,3879.94 ; 0.25,622.27 ccw(c197.1,622.27) 35.85,509.36 368.82,33.83 ccw(c433.32,78.99) 497.82,33.83 830.79,509.36 ccw(c669.54,622.27) 866.39,622.27 866.39,3878.2 ccw(c807.34,3878.2) 807.34,3937.26 ; 0.25,3878.2 cw(c59.31,3878.2) 59.31,3937.26 ; 59.31,3937.26 807.34,3937.26 ; 59.31,3937.26 59.31,3937.26 ; 807.34,3937.26 807.34,3937.26

## Silkscreen, mask and mechanical layers (free items; w line width, h text height)
Top Overlay:
  text "RX" at 88,3286 h26
  text "TX" at 88,3237 h26
  text "V+" at 88,3136 h26
  text "TMS" at 88,3086 h26
  text "TCK" at 159,3037 h26
  text "RES" at 159,2988 h26
  text "GND" at 159,2939 h26
Mechanical 1:
  the board outline again, w0.5